# EAGLE board Charging v0.1 (EAGLE 7.7.0)
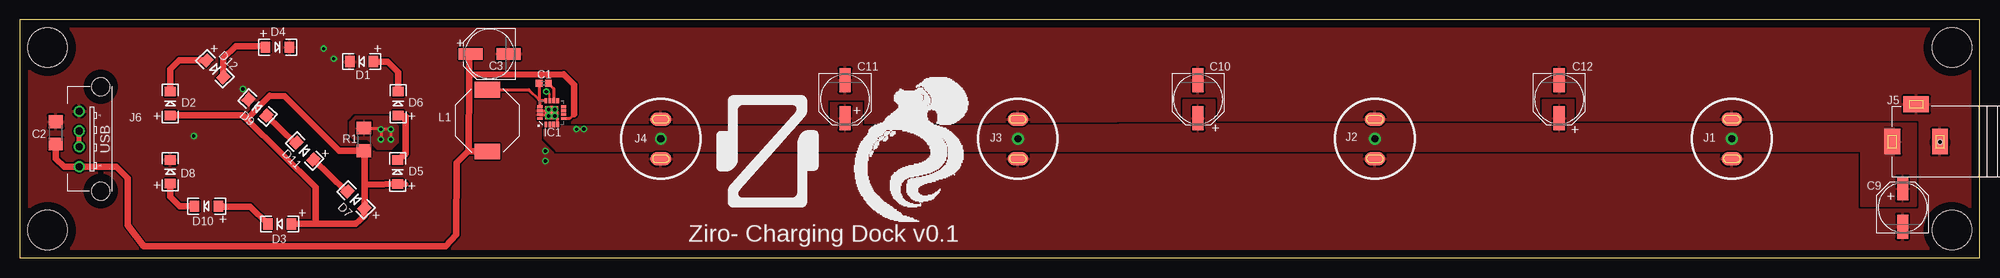
[diagram p0: board, top side]
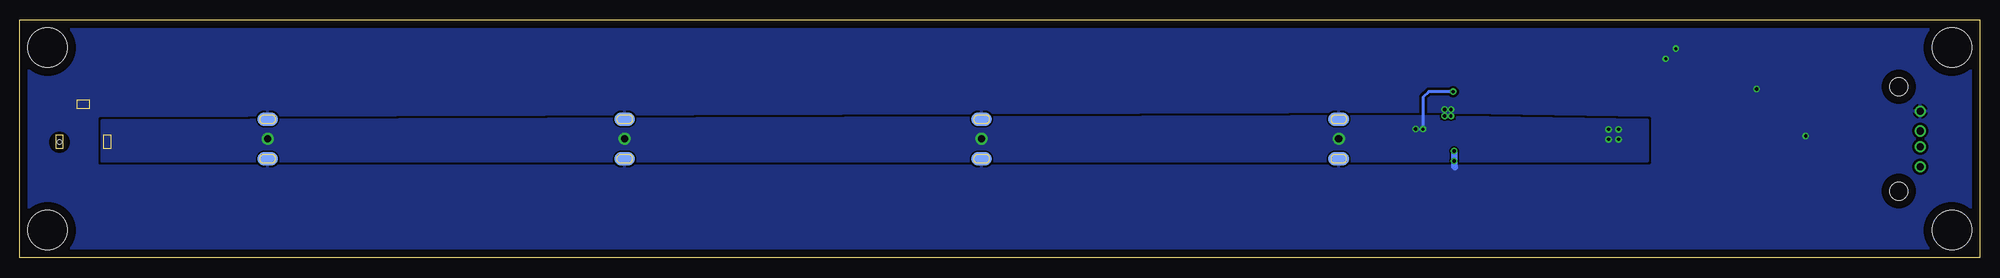
[diagram p1: board, bottom side, seen from below]

Size 247 x 30 mm. Coordinates in mm from the lower left corner, seen from the top.
Outline: 0,0 247,0 247,30 0,30 0,0
Copper layers (1*16): Top 0.035mm / dielectric 1.5mm / Bottom 0.035mm
Design rules "default": minimum track width 10mil, minimum drill 24mil, track to track 8mil, track to pad 8mil, pad to pad 8mil, via to via 8mil, smd to smd 8mil, copper to edge 40mil, drill to drill 8mil, minimum pad ring 10mil, minimum via ring 8mil, stop-mask expansion 4mil, vias tented up to drill 0mil, thermal gap 10mil
Holes 5 mm at 3.5,26.5 3.5,3.5 243.5,26.5 243.5,3.5
Holes 0.6 mm at 242,14.6
tRestrict: 5 lines

## Footprints (pad centres in the part's own frame; a part is rotated, then mirrored left to right if it is on the bottom)
0402-CAP = smd 0.85 x 0.9: 1 -0.58,0; 2 0.58,0
C1206 = smd 1.6 x 1.8: 1 -1.4,0; 2 1.4,0
PANASONIC_D = smd 3 x 1.4: + 2.4,0; - -2.4,0
LED-1206 = smd 1.2 x 1.4: A -1.5,0; C 1.5,0
QFN16G-0.5-3X3MM = smd 0.65 x 0.35: 1 -1.5,0.75; 2 -1.5,0.25; 3 -1.5,-0.25; 4 -1.5,-0.75; 9 1.5,-0.75; 10 1.5,-0.25; 11 1.5,0.25; 12 1.5,0.75 | smd 0.35 x 0.65: 5 -0.75,-1.5; 6 -0.25,-1.5; 7 0.25,-1.5; 8 0.75,-1.5; 13 0.75,1.5; 14 0.25,1.5; 15 -0.25,1.5; 16 -0.75,1.5 | smd 1.65 x 1.65: PAD 0,0
CONN-MAG = smd 1.7 x 2.6 bottom: GND@1 -2.475,0; GND@4 2.475,0 | smd 1.7 x 2.6: GND@2 2.475,0; GND@3 -2.475,0 | drill 0.9 pad 1.5: POS 0,0
CONN_JACK_THRU = smd 3.2 x 2: NEG@2 0,3; POS 0,-3 | smd 2 x 3.2: NEG@3 -4.7,0
USB-A-VERTICAL_MOUNT = drill 0.9: 1 -3.5,3.01; 2 -1,3.01; 3 1,3.01; 4 3.5,3.01 | hole 2.3: -6.57,0.3; 6.57,0.3
INDUCTOR_47UH = smd 2 x 3.2: P$1 -3.9,0; P$2 3.9,0
R1206 = smd 1.6 x 1.803: 1 -1.422,0; 2 1.422,0

## Placement (x,y rotation side)
C1  0.1uF  [0402-CAP]  66.04,22.01 180 top
C2  22u, 10V  [C1206]  4.53,15.75 90 top
C3  47u  [PANASONIC_D]  59.2,25.7 180 top
C9  47u  [PANASONIC_D]  237.3,6.35 90 top
C10  47u  [PANASONIC_D]  148.5,20 270 top
C11  47u  [PANASONIC_D]  104,20 270 top
C12  47u  [PANASONIC_D]  194,20 270 top
D1  GREEN  [LED-1206]  43.09,24.74 180 top
D2  GREEN  [LED-1206]  18.96,19.46 90 top
D3  GREEN  [LED-1206]  32.75,4.28 180 top
D4  GREEN  [LED-1206]  32.48,26.57 0 top
D5  GREEN  [LED-1206]  47.61,10.83 90 top
D6  GREEN  [LED-1206]  47.68,19.45 90 top
D7  GREEN  [LED-1206]  42.37,7.32 135 top
D8  GREEN  [LED-1206]  18.96,10.86 90 top
D9  GREEN  [LED-1206]  29.95,18.95 138 top
D10  GREEN  [LED-1206]  23.53,6.53 180 top
D11  GREEN  [LED-1206]  35.92,13.47 135 top
D12  GREEN  [LED-1206]  24.59,23.83 315 top
IC1  TS30011  [QFN16G-0.5-3X3MM]  67.04,18.31 90 top
J1  CONN-CIR_MAG  [CONN-MAG]  215.78,15 90 top
J2  CONN-CIR_MAG  [CONN-MAG]  170.78,15 90 top
J3  CONN-CIR_MAG  [CONN-MAG]  125.78,15 90 top
J4  CONN-CIR_MAG  [CONN-MAG]  80.78,15 90 top
J5  CP-102A-ND  [CONN_JACK_THRU]  239,14.65 270 top
J6  Vertical USB-A  [USB-A-VERTICAL_MOUNT]  10.5,15 90 top
L1  4.7UH,4.6A  [INDUCTOR_47UH]  58.93,17.31 270 top
R1  15E  [R1206]  43.37,14.94 90 top

## Library data of the parts
C1 = 1_ZeroUI; PROD_ID: CAP-12416
C2 R1 = resistor
C3 C9-C12 = 1_ZeroUI; PROD_ID: CAP-10547
D1-D12 = SparkFun-LED; PROD_ID: DIO-00862
IC1 J1-J6 L1 = 1_ZeroUI

## Nets
5V: C2.1 C3.+ IC1.5 J6.1 L1.P$2
9V: C9.+ C10.+ C11.+ C12.+ IC1.2 IC1.3 IC1.11 J1.POS J2.POS J3.POS J4.POS J5.POS R1.2
GND: C2.2 C3.- C9.- C10.- C11.- C12.- D1.C D4.C D8.C D9.C IC1.4 IC1.14 IC1.15 IC1.PAD J1.GND@1 J1.GND@2 J1.GND@3 J1.GND@4 J2.GND@1 J2.GND@2 J2.GND@3 J2.GND@4 J3.GND@1 J3.GND@2 J3.GND@3 J3.GND@4 J4.GND@1 J4.GND@2 J4.GND@3 J4.GND@4 J5.NEG@2 J5.NEG@3 J6.4
N$1: C1.2 IC1.1 IC1.12 IC1.13 IC1.16 L1.P$1
N$2: C1.1 IC1.10
N$3: D2.A D3.A D5.A D7.A R1.1
N$4: J6.2 J6.3
N$5: D2.C D12.A
N$6: D4.A D12.C
N$7: D8.A D10.C
N$8: D3.C D10.A
N$9: D7.C D11.A
N$10: D9.A D11.C
N$11: D1.A D6.C
N$12: D5.C D6.A

## Tracks (layer width: path | path; a pad name or v marks a point on that pad's centre or on a via)
5V
  Top 0.025: 56.61,24.84 56.94,24.84 C3.+
  Top 0.406: 7.16,11.48 J6.1 | 56.53,13.46 56.56,13.47 | L1.P$2 58,13.46 | 69.83,18.1 69.28,17.55 IC1.5
  Top 0.813: C2.1 4.55,12.5 5.59,11.48 7.16,11.48 | J6.1 7.01,11.5 12.15,11.5 13.61,10.05 13.61,4.12 15.62,1.5 53.64,1.5 54.96,2.92 55.05,12.01 56.53,13.46 | 56.6,22.78 56.56,13.47 58,13.46 | 56.6,22.78 56.61,24.84 | 69.83,18.1 69.83,21.82 68.53,23.12 56.6,23.09 56.6,22.78
9V  (via drill 0.41)
  Top 0.254: IC1.11 66.79,20.62 v66.37,20.96
  Top 0.406: 235.19,14.13 J5.POS | v70.16,16.23 v71.07,16.26 | R1.2 45.36,16.36 v45.51,16.21 | v45.51,16.21 v45.51,14.94 | v46.78,14.94 v46.78,16.21 v45.51,16.21
  Bottom 0.406: v66.37,20.96 69.44,20.96 70.15,20.25 v70.16,16.23 v71.07,16.26
  pour Bottom: 41.82,17.33 65.89,17.73 65.89,17.14 68.15,17.14 68.15,17.83 236.69,17.28 236.69,12.2 41.82,12.25
  pour Top: 232,6.6 239,6.6 239,16.95 195.87,16.85 195.87,19.85 191.87,19.85 191.87,16.85 150.61,16.85 150.61,19.85 146.61,19.85 146.61,16.85 106.15,16.5 106.15,19.5 102.15,19.5 102.15,16.5 69.32,16.51 68.46,16.51 67.72,17.25 66.06,17.25 66.06,15.08 67.64,13.5 232.05,13.5
  pour Top (no thermals): 233.08,16.44 236.23,16.44 236.23,12.59 233.08,12.59
  pour Top (no thermals): 66.74,17.31 67.01,17.24 70.01,15.24 68.04,14.31 66.72,16.41
  pour Top: 42.08,14.94 41.63,15.39 41.63,17.12 42.35,17.83 46.43,17.83 47.6,16.66 47.6,14.49 46.78,13.67 45.12,13.67 43.85,14.94
GND  (via drill 0.41)
  Top 0.406: IC1.14 66.5,18.56 v66.63,18.69 | IC1.15 66.45,18.06 v66.63,17.88 | IC1.4 67.79,17.54 v67.44,17.88
  Bottom 0.813: v66.22,13.46 66.22,11.51 66.17,11.45
  other vias: 67.44,18.69 21.92,15.37 28.13,21.29 38.29,26.37 39.56,25.1 66.22,12.22
  pour Top (rank 6): 276,102 276,-66 -32,-64 -32,104
  pour Bottom (isolate 0.3, rank 5): -14,94 257,95 257,-54 -14,-55
N$1
  Top 0.406: L1.P$1 64.14,21.21 65.44,19.91 | 65.44,19.91 65.54,19.81 | 65.54,19.81 IC1.13 | IC1.12 65.54,19.81 | C1.2 65.46,19.93 65.44,19.91
N$2
  Top 0.406: C1.1 67.29,21.34 67.29,19.86 IC1.10
N$3
  Top 0.813: D5.A 48.56,9.28 48.48,9.35 43.43,9.25 | 43.43,9.25 D7.A 43.38,5.27 42.35,4.28 D3.A 37.27,4.3 37.27,8.92 28.59,17.5 | 43.43,9.25 43.43,13.54 43.56,13.62 R1.1 40.27,13.52 33.37,20.4 31.48,20.41 28.59,17.5 | D2.A 28.03,17.96 28.16,17.94 | 28.16,17.94 28.59,17.5 | 28.59,17.5 28.65,17.52 28.16,17.94
N$4
  Top 0.61: J6.2 J6.3
N$5
  Top 0.813: D2.C 18.96,23.77 20.11,24.92 23.3,24.92 D12.A
N$6
  Top 0.813: D12.C 25.65,25.16 27.19,26.7 30.95,26.7 D4.A
N$7
  Top 0.813: D10.C 20.17,6.53 18.96,7.74 D8.A
N$8
  Top 0.813: D3.C 29.05,6.47 25.29,6.47 25.64,6.53 D10.A
N$9
  Top 0.813: D7.C 41.1,8.38 D11.A
N$10
  Top 0.813: D11.C 34.69,14.43 D9.A
N$11
  Top 0.813: D6.C 47.68,23.38 46.34,24.72 44.62,24.72 D1.A
N$12
  Top 0.813: D5.C 48.6,13.1 48.61,17.88 D6.A

## Text on the board
tPlace: + | + | + | + | + | + | + | + | + | + | + | + | + | + | + | + | Ziro- Charging Dock v0.1